# Altium PCB ROV_Voltage_Switch_1.1.PcbDoc (part 2 of 3)
Units mm, origin at the board's own origin, x right, y up, seen from the top; angles counter-clockwise.
Board outline 250 x 141 mm, 2 copper layers (Top Layer, Bottom Layer); 262 components, 176 nets, 724 pads, 155 vias.
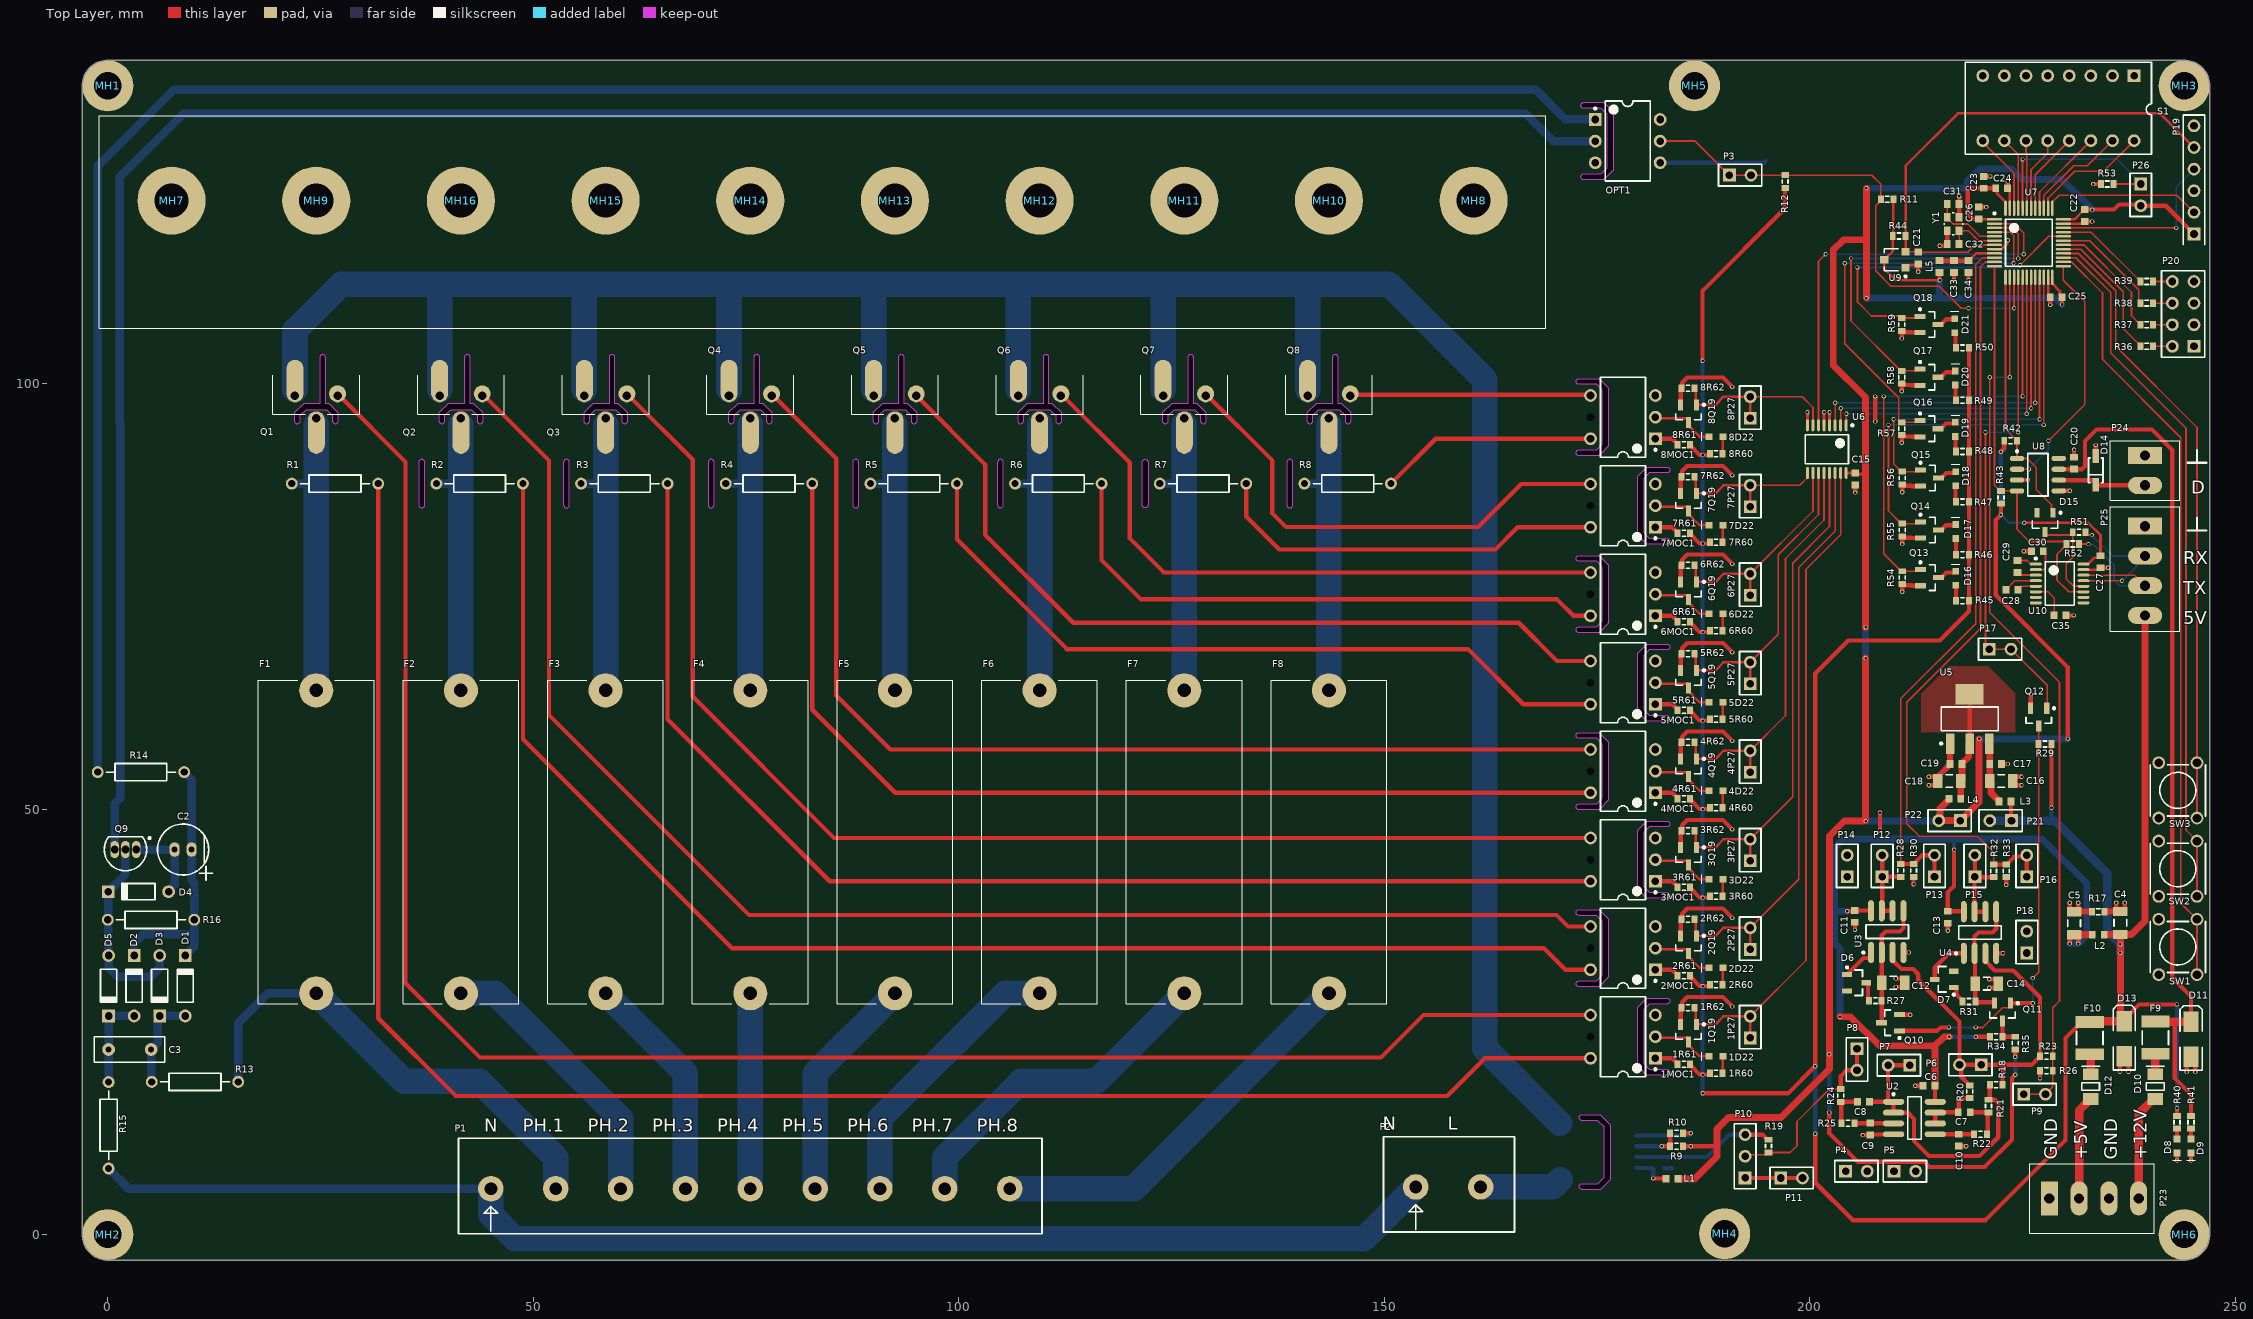
[diagram p0: Top Layer view]

## Part data (continued)
R1 R2 R3 R4 R5 R6 R7 R8 R13 R14 R15 R16: "Resistor", Case Code (in)=AXIAL-0.3, LatestRevisionDate=17-Jul-2002, LatestRevisionNote="Re-released for DXP Platform.", Note="Get 6 more of those.", PackageDescription="Axial Device, Thru-Hole; 2 Leads; 0.4 in Pin Spacing", PackageReference=AXIAL-0.4, Published=8-Jun-2000, Publisher="Altium Limited"
  R1 R2 R3 R4 R5 R6 R7 R8: Distributor Link=https://eu.mouser.com/ProductDetail/Yageo/CFR-25JB-52-360R?qs=sGAEpiMZZMsPqMdJzcrNwqM9OSsfvmTTETvHHPXiM%2FLP9NH589sNFg%3D%3D
  R13 R15: Distributor Link=https://eu.mouser.com/ProductDetail/Yageo/CFR-25JT-52-220K?qs=sGAEpiMZZMsPqMdJzcrNwiPCnpFTGbbhcMzgIt4VkwM%3D
  R14: Distributor Link=https://eu.mouser.com/ProductDetail/Yageo/CFR-12JT-52-1K?qs=sGAEpiMZZMsPqMdJzcrNwnIafLS3rQ8ceX3eBr2isTY%3D
  R16: Distributor Link=https://eu.mouser.com/ProductDetail/Vishay-Dale/CCF0722K0JKE36?qs=sGAEpiMZZMsPqMdJzcrNwpBqoc5gprOUzoFaNNDlFDY%3D
S1: "4009 Series DIP Switch, Raised actuator", Manufacturer Name="CTS Electronic Components", Manufacturer Part No.=210-8MS, ComponentLink1Description="Manufacturer Link", ComponentLink1URL=http://www.oupiin.com/prodindx.html#Headers, Distributor Link=https://eu.mouser.com/ProductDetail/CTS-Electronic-Components/210-8MS?qs=sGAEpiMZZMv%2F%252B2JhlA6ysCW5ZokGCVhUojtEeWEz7Rc%3D, LatestRevisionDate=17-Dec-2003, LatestRevisionNote="PCB Footprint replaced.", PackageDescription="DIP; 16 Leads; Row Spacing 7.62 mm; Pitch 2.54 mm", PackageReference=DIP-16-KEY, Published=24-Mar-1999, Publisher="Altium Limited"
SW1 SW2 SW3: Manufacturer Name="TE Connectivity", Manufacturer Part No.=FSM4JH, Distributor Link=https://eu.mouser.com/ProductDetail/TE-Connectivity-Alcoswitch/FSM4JH?qs=sGAEpiMZZMsgGjVA3toVBAK0o4DxfcqijSchET4px6U%3D, Price (per 100 in GBP)=0.12
U1: library part ACS723, "High-Accuracy, Galvanically Isolated Current Sensor IC / with Small Footprint SOIC8 Package", Manufacturer Name="Allegro MicroSystems", Distributor Link=https://www.digikey.com/product-detail/en/allegro-microsystems-llc/ACS722LLCTR-20AB-T/620-1637-1-ND/4948873, Manufacturer Part No.=ACS722LLCTR-20AB-T, Note="Get 5 more."
U2 U3 U4: library part MC1458D, "Dual General-Purpose Operational Amplifier", Manufacturer Name=TI, Code_IPC=SOIC127P600-8, ComponentLink1Description="Manufacturer Link", ComponentLink1URL=http://www.ti.com/, ComponentLink2Description=Datasheet, ComponentLink2URL=http://www-s.ti.com/sc/ds/mc1458.pdf, DatasheetVersion=May-1988, Distributor Link=https://eu.mouser.com/ProductDetail/Texas-Instruments/OPA2325IDR?qs=%2Fha2pyFadujaAA%252BPt%2FaiSE4IhM8K7gbY8eM5jbLcXgs%3D, LatestRevisionDate=13-Apr-2006, LatestRevisionNote="IPC-7351 Footprint Added.", Manufacturer Part No.=OPA2325IDR, Note="Get 6 more.", PackageDescription="8-Pin Small Outline Integrated Circuit 1.27 mm Pitch", PackageReference=D008, PackageVersion=Jan-1998, Published=15-Apr-2002, Publisher="Altium Limited"
U5: library part LM1117IMP-3.3, "800mA Low-Dropout Linear Regulator", Manufacturer="National Semiconductor", Manufacturer Name=TI, PackageTopMarking=XYTT*N05B, PowerWise=N, Code_IPC=SOT223-4, Code_JEDEC=TO-261-AA, ComponentLink1Description="LM1117 Datasheet", ComponentLink1URL=http://www.national.com/ds/LM/LM1117.pdf, ComponentLink2Description="LM1117 Web Page", ComponentLink2URL=http://www.national.com/pf/LM/LM1117.html, ComponentLink3Description="MP04A Package Page", ComponentLink3URL=http://www.national.com/packaging/folders/mp04a.html, CompType="LDO IC", DatasheetVersion=Apr-2006, DigiKeyPartNumber=LM1117IMP-3.3CT-ND, Distributor Link=http://uk.farnell.com/texas-instruments/lm1117imp-3-3-nopb/ldo-1-2vdo-3-3v-1-0-8a-3sot223/dp/1469051, Manufacturer Part No.=LM1117IMP-3.3CT-ND, PackageDescription="Molded SOT-223, 6.50 x 3.56 x 1.6mm Body, 4 Lead, 2.3mm Pitch", PackageReference=MP04A, PackageVersion="revB, Apr-2003", PartNumber=LM1117IMP-3.3, PinCount=4, Published=4-Dec-2008, Publisher="Altium Limited", RoHS=O
U6: "High-Speed CMOS Logic 3- to 8-Line Decoder/Demultiplexer Inverting", Manufacturer Name="Texas Instruments", Distributor Link=https://www.mouser.co.uk/ProductDetail/Texas-Instruments/CD74HC238PWR?qs=sGAEpiMZZMtxONTBFIcRfgMIbQHDmxeviPxqNdAY%252BDU%3D, Manufacturer Part No.=CD74HC238PWR
U7: library part STM32F030x4/6/8, "STM32 ARM-based 32-bit MCU with 32 Kbytes Flash, 48-pin LQFP, Industrial Temperature", Manufacturer Name=STMicroelectronics, ComponentLink1Description="Manufacturer Link", ComponentLink1URL=www.st.com/stm32, ComponentLink2Description=Datasheet, ComponentLink2URL=http://www.st.com/stonline/products/literature/ds/13586.pdf, DatasheetVersion="rev6, Mar-2008", Distributor Link=https://eu.mouser.com/ProductDetail/STMicroelectronics/STM32F030C6T6TR?qs=4b8myOmUP%252Bv8Ez53btAbrA%3D%3D, Manufacturer Part No.=STM32F030C6T6TR, Note="Get 3 more.", PackageDescription="48-Pin Low-Profile Quad Flat Pack, 7 x 7 mm Body, 0.5 mm Pitch (LQFP48)", PackageReference=LQFP48, PackageVersion=Mar-2008, Published=30-May-2008, Publisher="Altium Limited"
U8: library part MCP2003, "LIN J2602 Transceiver", Manufacturer Name="Microchip Technology", Distributor Link=https://eu.mouser.com/ProductDetail/Microchip-Technology/MCP2003-E-SN?qs=ktxxVfK6xptrXDCRqAtS%252Bg%3D%3D, Manufacturer Part No.=MCP2003-E/SN
U9: library part ADM809TART, "Microprocessor Supervisory Circuit in 3-Pin SOT-23", Manufacturer Name="Diodes Incorporated", ComponentLink1Description="Manufacturer Link", ComponentLink1URL=http://www.analog.com/en/prod/0,,766_822_ADM809%2C00.html, ComponentLink2Description=Datasheet, ComponentLink2URL=http://www.analog.com/UploadedFiles/Data_Sheets/101131995ADM803_9_10_e.pdf, DatasheetVersion="REV.0 1997", Distributor Link=https://eu.mouser.com/ProductDetail/Diodes-Incorporated/APX803S-31SA-7?qs=%2Fha2pyFaduhebEAPwwFyerWu7K%252BS8dKoSHRSm1tt3Sf7eJGT%2FIrr6g%3D%3D, G2K_PN=G-IC-APX803-31SA-SOT-23-01, LatestRevisionDate=17-Jul-2002, LatestRevisionNote="Re-released for DXP Platform.", Manufacturer Part No.=APX803S-31SA-7, Note="We have them in Bulgaria", PackageDescription="SOT-23; 3 Leads; Body 3.0 x 2.6 mm, inc. leads (LxW max)", PackageReference=RT-3, PackageVersion=rev0, Price=.0, Price (per 100 in GBP)=0.11, Price break at=1000, Published=8-Jun-2000, Publisher="Altium Limited"
U10: "3.0V TO 5.5V, Low-Power, up to 1Mbps, True RS-232 Transceiver Using Four 0.1µF External Capacitor", Manufacturer Name=TI, Manufacturer Part No.=MAX3232EIPWRQ1, ComponentLink1Description="Manufacturer Link", ComponentLink1URL=http://www.maxim-ic.com/, ComponentLink2Description=Datasheet, ComponentLink2URL=http://pdfserv.maxim-ic.com/en/ds/MAX3222-MAX3241.pdf, DatasheetVersion=Mar-1999, Distributor Link=http://uk.farnell.com/texas-instruments/max3232eipwrq1/line-driv-rcvr-rs232-250kbps-ssop/dp/2335570, LatestRevisionDate=29-May-2009, LatestRevisionNote="IPC-7351 Footprint Added.", PackageDescription="16-Pin Thin Small Outline Package 0.65 mm Pitch", PackageReference=TSSOP16, PackageVersion="21-0066 C", Published=16-Jan-2001, Publisher="Altium Limited"
Y1: library part XTAL, Manufacturer Name=AVX, Manufacturer Part No.=XRCGB24M000F2P00R0, Distributor Link=https://uk.farnell.com/murata/xrcgb24m000f2p00r0/crystal-24mhz-6pf-2-x-1-6mm/dp/2455832RL, Note="We have them in Bulgaria", Price (per 100 in GBP)=0.21

## Via types
v1: diameter 0.5, hole 0.3, Top Layer to Bottom Layer, tented both sides, 155 vias

## Nets (pads, with @x,y where several pads share a name; then routed paths per layer and width w, separated by ;. In a path a pad name is that pad's centre, name@x,y a point inside that pad or via, vN(x,y) a via of type N, cw(c..) or ccw(c..) an arc to the next point about the centre after c; other vN are vias at no path point)
+3V3: C15.2 C22.2 C23.2 C24.2 C25.2 C26.2 C27.2 L1.1 L4.2 L5.1 P19.1 P22.1 P22.2 P26.2 R9.2 R11.1 R35.2 R42.2 R43.2 R44.2 U6.16 U7.1 U7.24 U7.36 U7.48 U9.3 U10.16 | length 393.2
  Top Layer w0.3: R44.2@209.655,117.445 R44.2@209.75,117.35 ; R11.1@209.85,121.65 209.8,121.6 R44.2@209.8,117.4 ; R44.2@209.9,117.5 R44.2@209.8,117.4 ; L5.1@215.2,113.05 L5.1@215.25,113.05 ; v1(215.25,112.15) 210.05,112.15 208.75,113.45 U9.3@208.75,114.55 208.775,114.55 209.075,114.85 209.075,114.875 209.75,115.55 R44.2@209.75,117.35 ; C26.2@219.85,119.35 219.9,119.3 U7.1@221.7,119.3 ; C24.2@221.75,122.95 222,122.7 222,122.35 223,121.35 U7.48@223,120.6 ; v1(225.2,83.65) 232.7,83.65 234.162,82.188 C27.2@234.162,79.763 233.912,79.513 233.412,79.513 232.688,78.788 U10.16@232.162,78.788 ; U7.24@228.5,112.5 228.5,111.75 229.4,110.85 229.4,110.4 C25.2@229.65,110.15 ; U7.36@229.8,119.3 231.1,119.3 232.25,120.45 C22.2@232.3,120.45 ; R44.2@209.75,117.35 R44.2@209.8,117.4
  Top Layer w0.35: U6.16@204.275,89.5 C15.2@205.35,89.5 205.475,89.375 206.325,89.375 206.55,89.15
  Top Layer w0.5: R9.2@185.1,10.4 v1(186,10.4) 188.95,10.4 ; v1(202.3,14.35) 202.3,11.9 205.623,8.577 213.423,8.577 214.05,7.95 220.55,7.95 223.75,11.15 223.75,18.4 v1(224.15,18.8) ; v1(215.25,112.15) L5.1@215.25,113.05 ; C24.2@221.85,122.95 C23.2@220.425,122.95 v1(218.55,122.95) 218.55,119.95 219.15,119.35 C26.2@219.8,119.35 ; v1(222.45,92) 222.85,92.4 R42.2@222.85,93.3 ; R43.2@222.46,85.89 v1(222.46,84.595) 221.85,83.985 221.85,75.15 230.3,66.7 v1(230.3,58.25) ; v1(224.15,20.9) R35.2@224.15,21.75 ; v1(229.65,109.3) C25.2@229.65,110.15 ; C22.2@232.3,120.45 v1(233.2,120.45) 235.75,120.45 236.35,121.05 238.75,121.05 P26.2@238.89,120.91 241.83,120.91 P19.1@245.15,117.59 ; C26.2@219.8,119.35 C26.2@219.85,119.35 C26.2@219.8,119.35
  Top Layer w0.8: L1.1@184.5,6.55 186.45,6.55 189.1,9.2 189.1,12.4 190.45,13.75 196.6,13.75 202.3,19.45 v1(202.3,21.2) 202.3,46.85 204.05,48.6 v1(206.55,48.6) v1(206.55,67.75) ; v1(206.55,71.35) 206.55,89.15 206.55,98.4 202.75,102.2 202.75,115.7 203.95,116.9 206.65,116.9 ; v1(206.65,110.05) 206.65,116.9 ; v1(206.65,122.95) 206.65,116.9 ; L4.2@216.35,51.2 216.35,51.15 215.294,50.094 215.294,48.784 P22.2@215.16,48.65 P22.1@217.7,48.65 219.9,50.85 v1(219.9,58.25)
  Bottom Layer w0.3: v1(222.46,84.595) 223.405,83.65 v1(225.2,83.65)
  Bottom Layer w0.5: v1(202.3,14.35) v1(202.3,21.2) ; v1(222.45,92) 222.45,84.605 v1(222.46,84.595) ; v1(224.15,18.8) v1(224.15,20.9)
  Bottom Layer w0.8: v1(206.55,48.6) 215.11,48.6 P22.2@215.16,48.65 ; v1(206.55,67.75) v1(206.55,71.35) ; v1(206.65,110.05) 215.3,110.05 ; v1(206.65,122.95) v1(218.55,122.95) 218.55,123.85 219.95,125.25 223.7,125.25 224.95,124 229.65,124 v1(233.2,120.45) ; v1(215.25,112.15) 215.25,110.1 215.3,110.05 ; v1(219.9,58.25) v1(230.3,58.25) ; v1(229.65,109.3) 228.923,110.027 215.323,110.027 215.3,110.05